# Altium PCB BOCD_1_02_Daughter_NBP2.PcbDoc (part 2 of 2)
Units mil, origin at the board's own origin, x right, y up, seen from the top; angles counter-clockwise.
Board outline 2716.51 x 3188.78 mil, 2 copper layers (Top Layer, Bottom Layer); 52 components, 189 nets, 558 pads, 192 vias.
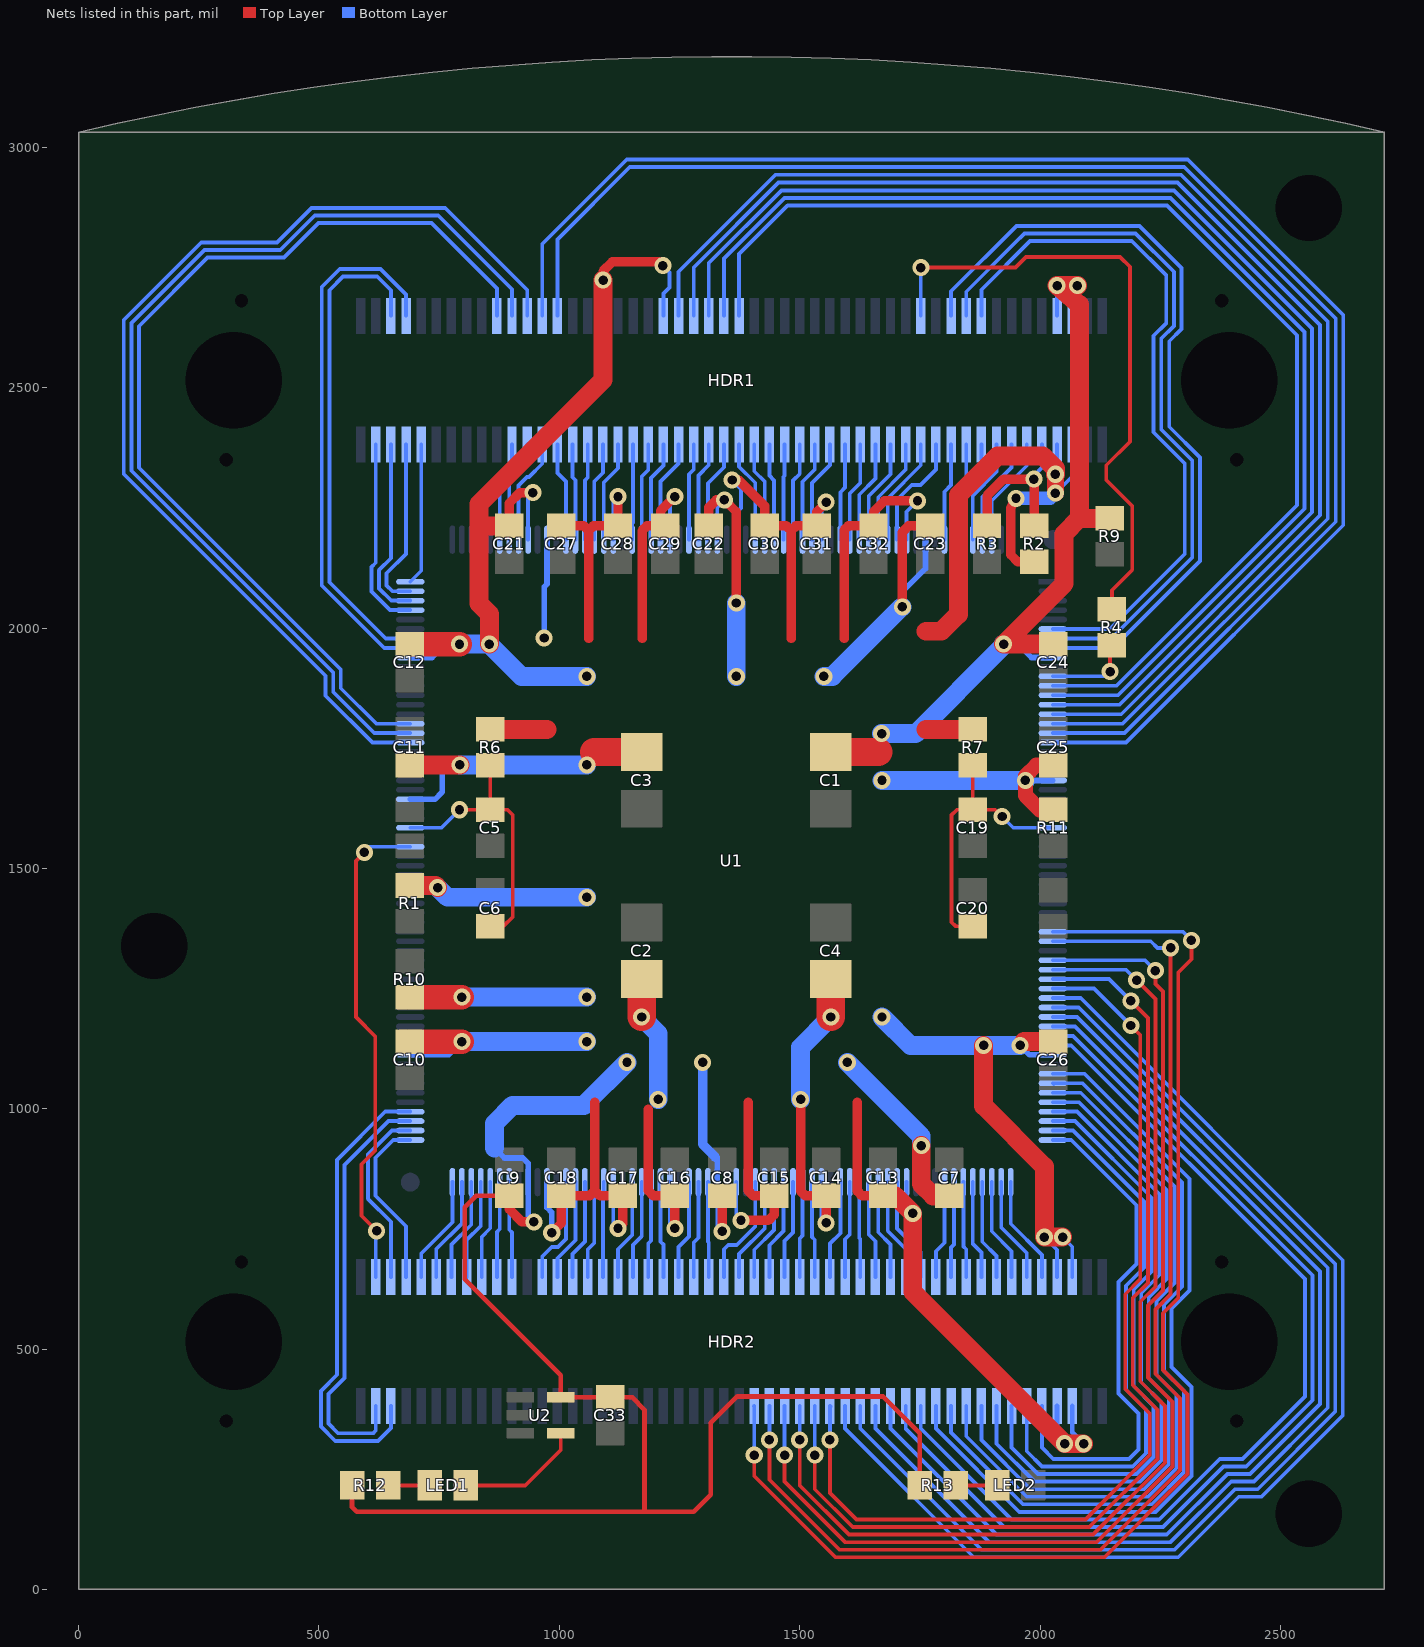
[diagram p2: the nets of this part, all layers, seen from the top]

## Via types
v1: diameter 35.43, hole 19.68, Top Layer to Bottom Layer, 192 vias

## Nets (pads, with @x,y where several pads share a name; then routed paths per layer and width w, separated by ;. In a path a pad name is that pad's centre, name@x,y a point inside that pad or via, vN(x,y) a via of type N, cw(c..) or ccw(c..) an arc to the next point about the centre after c; other vN are vias at no path point) (continued)
IO23: HDR2.53 U1.38 | length 2641.5
  Top Layer w7.87: v1(1405.51,279.53) 1405.51,236.22 1574.8,66.93 2133.86,66.93 2307.09,240.16 2307.09,405.51 2255.91,456.69 2255.91,574.8 2287.4,606.3 2287.4,1283.46 2314.96,1311.02 v1(2314.96,1350.39)
  Bottom Layer w7.87: HDR2.53@1405,381.38 HDR2.53@1405.51,381.89 v1(1405.51,279.53) ; U1.38@2026.57,1368.11 2297.24,1368.11 v1(2314.96,1350.39)
IO24: HDR2.55 U1.39 | length 2508.4
  Top Layer w7.87: v1(1437.01,311.02) 1437.01,228.35 1582.68,82.68 2125.98,82.68 2291.34,248.03 2291.34,397.64 2240.16,448.82 2240.16,582.68 2271.65,614.17 v1(2271.65,1334.65)
  Bottom Layer w7.87: v1(1437.01,311.02) HDR2.55@1437.01,381.89 ; U1.39@2026.57,1348.43 2230.31,1348.43 2244.09,1334.65 v1(2271.65,1334.65)
IO25: HDR2.57 U1.41 | length 2376.8
  Top Layer w7.87: v1(1468.5,279.53) 1468.5,224.41 1594.49,98.43 2118.11,98.43 2275.59,255.91 2275.59,389.76 2224.41,440.94 2224.41,590.55 2255.91,622.05 2255.91,1244.09 2240.16,1259.84 v1(2240.16,1287.4)
  Bottom Layer w7.87: v1(1468.5,279.53) HDR2.57@1468.5,381.89 ; U1.41@2026.57,1309.06 2218.5,1309.06 v1(2240.16,1287.4)
IO26: HDR2.59 U1.42 | length 2267.2
  Top Layer w7.87: v1(1500,311.02) 1500,216.54 1602.36,114.17 2110.24,114.17 2259.84,263.78 2259.84,381.89 2208.66,433.07 2208.66,598.43 2240.16,629.92 2240.16,1228.35 v1(2200.79,1267.72)
  Bottom Layer w7.87: v1(1500,311.02) HDR2.59@1500,381.89 ; U1.42@2026.57,1289.37 2179.13,1289.37 v1(2200.79,1267.72)
IO27: HDR2.61 U1.43 | length 2160
  Top Layer w7.87: v1(1531.5,279.53) 1531.5,208.66 1610.24,129.92 2102.36,129.92 2244.09,271.65 2244.09,374.02 2192.91,425.2 2192.91,606.3 2224.41,637.8 2224.41,1188.98 v1(2188.98,1224.41)
  Bottom Layer w7.87: v1(1531.5,279.53) HDR2.61@1531.5,381.89 ; U1.43@2026.57,1269.69 2143.7,1269.69 v1(2188.98,1224.41)
IO28: HDR2.63 U1.44 | length 2056.4
  Top Layer w7.87: v1(1562.99,311.02) 1562.99,200.79 1618.11,145.67 2094.49,145.67 2228.35,279.53 2228.35,366.14 2177.17,417.32 2177.17,614.17 2208.66,645.67 2208.66,1153.54 v1(2188.98,1173.23)
  Bottom Layer w7.87: v1(1562.99,311.02) HDR2.63@1562.99,381.89 HDR2.63@1563.98,380.91 ; U1.44@2026.57,1250 2112.2,1250 v1(2188.98,1173.23)
IO29: HDR2.65 U1.45 | length 2467.9
  Bottom Layer w7.87: HDR2.65@1594.49,381.89 1594.49,334.65 1862.2,66.93 2287.4,66.93 2413.39,192.91 2460.63,192.91 2629.92,362.2 2629.92,685.04 2084.64,1230.32 U1.45@2026.57,1230.32
IO30: HDR2.67 U1.46 | length 2374.5
  Bottom Layer w7.87: HDR2.67@1625.98,381.89 1625.98,334.65 1877.95,82.68 2279.53,82.68 2405.51,208.66 2452.76,208.66 2614.17,370.08 2614.17,677.17 2080.71,1210.63 U1.46@2026.57,1210.63
IO31: HDR2.69 U1.47 | length 2281.1
  Bottom Layer w7.87: HDR2.69@1657.48,381.89 1657.48,334.65 1893.7,98.43 2271.65,98.43 2397.64,224.41 2444.88,224.41 2598.43,377.95 2598.43,669.29 2076.77,1190.94 U1.47@2026.57,1190.94
IO32: HDR2.71 U1.48 | length 2187.7
  Bottom Layer w7.87: HDR2.71@1688.98,381.89 1688.98,334.65 1909.45,114.17 2263.78,114.17 2389.76,240.16 2437.01,240.16 2582.68,385.83 2582.68,661.42 2072.83,1171.26 U1.48@2026.57,1171.26
IO33: HDR2.73 U1.49 | length 2094.2
  Bottom Layer w7.87: HDR2.73@1720.47,381.89 1720.47,334.64 1925.2,129.92 2255.91,129.92 2381.89,255.91 2429.13,255.91 2566.93,393.7 2566.93,653.54 2068.9,1151.57 U1.49@2026.57,1151.57
IO34: HDR2.75 U1.50 | length 2000.8
  Bottom Layer w7.87: HDR2.75@1751.97,381.89 1751.97,334.65 1940.95,145.67 2248.03,145.67 2374.02,271.65 2421.26,271.65 2551.18,401.57 2551.18,645.67 2064.96,1131.89 U1.50@2026.57,1131.89
IO35: HDR2.77 U1.53 | length 1707.2
  Bottom Layer w7.87: HDR2.77@1783.47,381.89 1783.47,334.65 1956.69,161.42 2240.16,161.42 2314.96,236.22 2314.96,421.26 2273.62,462.6 2273.62,584.65 2311.02,622.05 2311.02,854.33 2092.52,1072.83 U1.53@2026.57,1072.83
JIOA0: HDR1.3 U1.177 | length 406.4
  Bottom Layer w7.87: HDR1.3@618.11,2381.89 618.11,2135.9 609.25,2127.05 609.25,2075.79 647.64,2037.4 U1.177@689.96,2037.4
JIOA1: HDR1.5 U1.178 | length 385.2
  Bottom Layer w7.87: HDR1.5@649.61,2381.89 649.61,2145.13 625,2120.52 625,2082.31 650.22,2057.09 U1.178@689.96,2057.09
JIOA2: HDR1.7 U1.179 | length 364
  Bottom Layer w7.87: HDR1.7@681.1,2381.89 681.1,2154.35 640.75,2114 640.75,2088.83 652.81,2076.77 U1.179@689.96,2076.77
JIOA3: HDR1.9 U1.180 | length 294.8
  Bottom Layer w7.87: U1.180@689.96,2096.46 712.6,2119.09 HDR1.9@712.6,2381.89
JIOB0: HDR1.83 U1.235 | length 213.3
  Bottom Layer w7.87: U1.235@1840.55,2184.06 1840.55,2278.42 1877.95,2315.82 HDR1.83@1877.95,2381.89
JIOB1: HDR1.85 U1.236 | length 218.2
  Bottom Layer w7.87: U1.236@1860.24,2184.06 1860.24,2275.83 1909.45,2325.05 HDR1.85@1909.45,2381.89
JIOB2: HDR1.87 U1.237 | length 223.1
  Bottom Layer w7.87: U1.237@1879.92,2184.06 1879.92,2273.25 1940.95,2334.27 HDR1.87@1940.95,2381.89
JIOB3: HDR1.89 U1.238 | length 228
  Bottom Layer w7.87: U1.238@1899.61,2184.06 1899.61,2264.76 1972.44,2337.6 HDR1.89@1972.44,2381.89
KBCLOCK: HDR1.22 U1.164 | length 2140.4
  Bottom Layer w7.87: U1.164@689.96,1781.5 615.16,1781.5 529.53,1867.13 529.53,1907.34 109.75,2327.12 109.75,2634.61 261.56,2786.42 419.29,2786.42 491.14,2858.27 748.03,2858.27 901.57,2704.72 HDR1.22@901.57,2649.61
KBDATA: HDR1.24 U1.163 | length 2232.5
  Bottom Layer w7.87: U1.163@689.96,1761.81 611.22,1761.81 513.78,1859.25 513.78,1900.82 94,2320.6 94,2641.13 255.04,2802.17 412.77,2802.17 484.62,2874.02 762.8,2874.02 933.07,2703.74 HDR1.24@933.07,2649.61
LCD_BCKL: HDR2.22 U1.114 | length 203.1
  Bottom Layer w7.87: U1.114@897.64,845.47 U1.114@895.67,847.44 895.67,748.28 901.57,742.38 HDR2.22@901.57,649.61
LCD_E: HDR2.26 U1.108 | length 225.7
  Bottom Layer w7.87: HDR2.26@964.57,649.61 964.57,692.91 984.25,712.6 997.05,712.6 1013.78,729.33 U1.108@1013.78,847.44
LED0: HDR2.60 U1.83 | length 200.3
  Bottom Layer w7.87: HDR2.60@1500,649.61 1500,730.32 1505.91,736.22 U1.83@1505.91,847.44
LED1: HDR2.62 U1.82 | length 200.3
  Bottom Layer w7.87: U1.82@1525.59,847.44 1525.59,733.27 1531.5,727.36 HDR2.62@1531.5,649.61
LED2: HDR2.64 U1.79 | length 206.8
  Bottom Layer w7.87: HDR2.64@1562.99,649.61 1562.99,719.49 1584.65,741.14 U1.79@1584.65,847.44
LED3: HDR2.66 U1.78 | length 201.9
  Bottom Layer w7.87: HDR2.66@1594.49,649.61 1594.49,728.71 1604.33,738.56 U1.78@1604.33,847.44
LED4: HDR2.68 U1.77 | length 198.7
  Bottom Layer w7.87: U1.77@1624.02,847.44 1624.02,731.3 1625.98,729.33 HDR2.68@1625.98,649.61
LED5: HDR2.70 U1.76 | length 203.5
  Bottom Layer w7.87: U1.76@1643.7,847.44 1643.7,738.19 1657.48,724.41 HDR2.70@1657.48,649.61
LED6: HDR2.72 U1.75 | length 208.4
  Bottom Layer w7.87: U1.75@1663.39,847.44 1663.39,743.11 1688.98,717.52 HDR2.72@1688.98,649.61
LED7: HDR2.74 U1.74 | length 213.3
  Bottom Layer w7.87: U1.74@1683.07,847.44 1683.07,746.06 1720.47,708.66 HDR2.74@1720.47,649.61
MOUSECLOCK: HDR1.26 U1.18 | length 3251.5
  Bottom Layer w7.87: HDR1.26@964.57,2649.61 964.57,2799.21 1140.1,2974.75 2307.25,2974.75 2630.91,2651.09 2630.91,2213.91 2178.81,1761.81 U1.18@2026.57,1761.81
MOUSEDATA: HDR1.28 U1.17 | length 3164.2
  Bottom Layer w7.87: HDR1.28@996.06,2649.61 996.06,2808.44 1146.63,2959 2300,2959 2615.16,2643.84 2615.16,2221.16 2175.5,1781.5 U1.17@2026.57,1781.5
NetC5_1: C5.1 C6.1 R6.2 U1.154 | length 592.2
  Top Layer w7.87: v1(792.32,1622.05) C5.1@856.3,1622.05 ; C6.1@856.3,1379.92 883.92,1379.92 903,1399 903,1611 891.95,1622.05 C5.1@856.3,1622.05 ; R6.2@856.3,1714.57 C5.1@856.3,1622.05
  Bottom Layer w7.87: U1.154@689.96,1584.65 754.92,1584.65 v1(792.32,1622.05)
NetC19_2: C19.2 C20.2 R7.2 U1.27 | length 593.7
  Top Layer w7.87: C20.2@1860.24,1379.92 1824.08,1379.92 1816,1388 1816,1611 1827.05,1622.05 1906.95,1622.05 v1(1921,1608) ; C19.2@1860.24,1622.05 R7.2@1860.24,1714.57
  Bottom Layer w7.87: v1(1921,1608) 1944.35,1584.65 U1.27@2026.57,1584.65
NetLED1_1: LED1.1 R12.2 | length 86.6
  Top Layer w7.87: R12.2@643.7,216.54 LED1.1@730.32,216.54
NetLED1_2: LED1.2 U2.4 | length 262.9
  Top Layer w7.87: LED1.2@805.12,216.54 929.13,216.54 1002.95,290.35 U2.4@1002.95,324.8
NetLED2_1: LED2.1 R13.2 | length 86.6
  Top Layer w7.87: R13.2@1824.8,216.54 LED2.1@1911.42,216.54
NEXUS_TCK: HDR1.82 U1.7 | length 1557.6
  Bottom Layer w7.87: HDR1.82@1846.46,2649.61 1846.46,2699.8 1947.53,2800.88 1967.52,2820.87 2198.82,2820.87 2278.54,2741.14 2278.54,2628.39 2252,2601.84 2252,2413.73 2316.78,2348.95 2316.78,2146.78 2148.35,1978.35 U1.7@2026.57,1978.35
NEXUS_TDI: HDR1.84 U1.6 | length 1467
  Bottom Layer w7.87: HDR1.84@1877.95,2649.61 1877.95,2703.74 1979.33,2805.12 2190.94,2805.12 2262.8,2733.27 2262.8,2634.91 2236,2608.11 2236,2407.46 2301,2342.46 2301,2154.03 2145,1998.03 U1.6@2026.57,1998.03
NEXUS_TDO: HDR1.76 R4.2 | length 1325.6
  Top Layer w7.87: v1(1751.97,2750) 1949.08,2750 1971.09,2772.01 2166.64,2772.01 2187.01,2751.64 2187.01,2387.8 2137.8,2338.58 2137.8,2308.2 2192,2254 2192,2121.13 2149.61,2078.74 R4.2@2149.61,2039.37
  Bottom Layer w7.87: HDR1.76@1751.97,2649.61 v1(1751.97,2750)
NEXUS_TDO#: R4.1 U1.11 | length 194
  Top Layer w7.87: v1(2145.67,1909.45) R4.1@2145.67,1980.31
  Bottom Layer w7.87: U1.11@2026.57,1899.61 2135.83,1899.61 v1(2145.67,1909.45)
NEXUS_TMS: HDR1.80 U1.8 | length 1650.8
  Bottom Layer w7.87: HDR1.80@1814.96,2649.61 1814.96,2700.79 1950.79,2836.61 2206.69,2836.61 2294.29,2749.02 2294.29,2621.86 2269,2596.57 2269,2419 2333,2355 2333,2139.66 2152,1958.66 U1.8@2026.57,1958.66
RAM0_DATA0: HDR2.42 U1.98 | length 200.3
  Bottom Layer w7.87: U1.98@1210.63,847.44 1210.63,723.43 1216.54,717.52 HDR2.42@1216.54,649.61
RAM0_DATA1: HDR2.40 U1.99 | length 200.3
  Bottom Layer w7.87: HDR2.40@1185.04,649.61 1185.04,719.49 1190.94,725.39 U1.99@1190.94,847.44
RAM0_DATA2: HDR2.38 U1.100 | length 205.2
  Bottom Layer w7.87: HDR2.38@1153.54,649.61 1153.54,716.9 1171.26,734.62 U1.100@1171.26,847.44
RAM0_DATA3: HDR2.36 U1.101 | length 210.1
  Bottom Layer w7.87: HDR2.36@1122.05,649.61 1122.05,707.68 1151.57,737.2 U1.101@1151.57,847.44
RAM0_DATA4: HDR2.34 U1.104 | length 198.7
  Bottom Layer w7.87: HDR2.34@1090.55,649.61 1090.55,810.04 1092.52,812.01 U1.104@1092.52,847.44
RAM0_DATA5: HDR2.32 U1.105 | length 203.5
  Bottom Layer w7.87: HDR2.32@1059.05,649.61 1059.05,707.43 1072.83,721.21 U1.105@1072.83,847.44
RAM0_DATA6: HDR2.30 U1.106 | length 208.4
  Bottom Layer w7.87: HDR2.30@1027.56,649.61 1027.56,698.2 1053.15,723.79 U1.106@1053.15,847.44
RAM0_DATA7: HDR2.28 U1.107 | length 213.3
  Bottom Layer w7.87: HDR2.28@996.06,649.61 996.06,688.98 1033.46,726.38 U1.107@1033.46,847.44
RAM0_OE: HDR1.41 U1.202 | length 208.4
  Bottom Layer w7.87: U1.202@1190.94,2184.06 1190.94,2312.37 1216.54,2337.97 HDR1.41@1216.54,2381.89
RAM0_WE: HDR1.79 U1.233 | length 203.5
  Bottom Layer w7.87: U1.233@1801.18,2184.06 1801.18,2283.59 1814.96,2297.37 HDR1.79@1814.96,2381.89
RAM1_DATA0: HDR1.45 U1.206 | length 201.9
  Bottom Layer w7.87: U1.206@1269.69,2184.06 1269.69,2319.88 1279.53,2329.72 HDR1.45@1279.53,2381.89
RAM1_DATA1: HDR1.49 U1.208 | length 211.7
  Bottom Layer w7.87: U1.208@1309.06,2184.06 1309.06,2301.18 1342.52,2334.65 HDR1.49@1342.52,2381.89
RAM1_DATA2: HDR1.53 U1.214 | length 206.8
  Bottom Layer w7.87: HDR1.53@1405.51,2381.89 1405.51,2326.4 1427.17,2304.75 U1.214@1427.17,2184.06
RAM1_DATA3: HDR1.57 U1.216 | length 198.6
  Bottom Layer w7.87: U1.216@1466.54,2184.06 1466.54,2314.96 1468.5,2316.93 HDR1.57@1468.5,2381.89
RAM1_DATA4: HDR1.55 U1.215 | length 201.9
  Bottom Layer w7.87: HDR1.55@1437.01,2381.89 1437.01,2317.18 1446.85,2307.34 U1.215@1446.85,2184.06
RAM1_DATA5: HDR1.51 U1.213 | length 211.7
  Bottom Layer w7.87: HDR1.51@1374.02,2381.89 1374.02,2335.63 1407.48,2302.17 U1.213@1407.48,2184.06
RAM1_DATA6: HDR1.47 U1.207 | length 206.8
  Bottom Layer w7.87: U1.207@1289.37,2184.06 1289.37,2317.3 1311.02,2338.95 HDR1.47@1311.02,2381.89
RAM1_DATA7: HDR1.43 U1.203 | length 213.3
  Bottom Layer w7.87: U1.203@1210.63,2184.06 1210.63,2305.12 1248.03,2342.52 HDR1.43@1248.03,2381.89
RAM1_OE: HDR1.39 U1.201 | length 203.5
  Bottom Layer w7.87: U1.201@1171.26,2184.06 1171.26,2314.96 1185.04,2328.74 HDR1.39@1185.04,2381.89
RAM1_WE: HDR1.61 U1.218 | length 208.4
  Bottom Layer w7.87: U1.218@1505.91,2184.06 1505.91,2304.5 1531.5,2330.09 HDR1.61@1531.5,2381.89
RAM_ADDR0: HDR1.21 U1.186 | length 208.4
  Bottom Layer w7.87: U1.186@875.98,2184.06 875.98,2308.64 901.57,2334.23 HDR1.21@901.57,2381.89
RAM_ADDR1: HDR1.25 U1.188 | length 220.6
  Bottom Layer w7.87: U1.188@915.35,2184.06 915.35,2296.79 932.97,2314.4 936.97,2314.4 964.57,2342 HDR1.25@964.57,2381.89
RAM_ADDR2: HDR1.29 U1.194 | length 200.3
  Bottom Layer w7.87: HDR1.29@1027.56,2381.89 1027.56,2313.61 1033.46,2307.7 U1.194@1033.46,2184.06
RAM_ADDR3: HDR1.33 U1.196 | length 205.2
  Bottom Layer w7.87: U1.196@1072.83,2184.06 1072.83,2305.38 1090.55,2323.1 HDR1.33@1090.55,2381.89
RAM_ADDR4: HDR1.65 U1.222 | length 201.9
  Bottom Layer w7.87: U1.222@1584.65,2184.06 1584.65,2282.61 1594.49,2292.46 HDR1.65@1594.49,2381.89
RAM_ADDR5: HDR1.69 U1.224 | length 211.7
  Bottom Layer w7.87: U1.224@1624.02,2184.06 1624.02,2277.44 1657.48,2310.91 HDR1.69@1657.48,2381.89
RAM_ADDR6: HDR1.73 U1.226 | length 221.5
  Bottom Layer w7.87: U1.226@1663.39,2184.06 1663.39,2272.27 1720.47,2329.36 HDR1.73@1720.47,2381.89
RAM_ADDR7: HDR1.77 U1.228 | length 241.8
  Bottom Layer w7.87: U1.228@1702.76,2184.06 1702.76,2266.93 1733.27,2297.44 1751.18,2297.44 1783.47,2329.73 HDR1.77@1783.47,2381.89
RAM_ADDR8: HDR1.75 U1.227 | length 226.4
  Bottom Layer w7.87: U1.227@1683.07,2184.06 1683.07,2269.68 1751.97,2338.58 HDR1.75@1751.97,2381.89
RAM_ADDR9: HDR1.71 U1.225 | length 216.6
  Bottom Layer w7.87: U1.225@1643.7,2184.06 1643.7,2274.86 1688.98,2320.13 HDR1.71@1688.98,2381.89
RAM_ADDR10: HDR1.67 U1.223 | length 206.8
  Bottom Layer w7.87: U1.223@1604.33,2184.06 1604.33,2280.03 1625.98,2301.68 HDR1.67@1625.98,2381.89
RAM_ADDR11: HDR1.63 U1.219 | length 213.3
  Bottom Layer w7.87: U1.219@1525.59,2184.06 1525.59,2301.91 1562.99,2339.32 HDR1.63@1562.99,2381.89
RAM_ADDR12: HDR1.59 U1.217 | length 203.5
  Bottom Layer w7.87: U1.217@1486.22,2184.06 1486.22,2307.09 1500,2320.87 HDR1.59@1500,2381.89
RAM_ADDR13: HDR1.35 U1.197 | length 210.1
  Bottom Layer w7.87: U1.197@1092.52,2184.06 1092.52,2302.79 1122.05,2332.32 HDR1.35@1122.05,2381.89
RAM_ADDR14: HDR1.31 U1.195 | length 200.3
  Bottom Layer w7.87: U1.195@1053.15,2184.06 1053.15,2307.1 1059.05,2313 HDR1.31@1059.05,2381.89
RAM_ADDR15: HDR1.27 U1.193 | length 205.2
  Bottom Layer w7.87: HDR1.27@996.06,2381.89 996.06,2322.83 1013.78,2305.12 U1.193@1013.78,2184.06
RAM_ADDR16: HDR1.23 U1.187 | length 213.3
  Bottom Layer w7.87: U1.187@895.67,2184.06 895.67,2302.6 933.07,2340 HDR1.23@933.07,2381.89
RAM_CS: HDR1.37 U1.200 | length 198.7
  Bottom Layer w7.87: U1.200@1151.57,2184.06 1151.57,2217.52 1153.54,2219.49 HDR1.37@1153.54,2381.89
RED0: HDR1.6 U1.174 | length 1028.9
  Bottom Layer w7.87: HDR1.6@649.61,2649.61 649.61,2702.76 621.06,2731.3 550.2,2731.3 521.65,2702.76 521.65,2095.47 638.78,1978.35 U1.174@689.96,1978.35
RED1: HDR1.8 U1.173 | length 1115.9
  Bottom Layer w7.87: HDR1.8@681.1,2649.61 681.1,2693.9 627.95,2747.05 543.31,2747.05 505.91,2709.65 505.91,2088.58 635.83,1958.66 U1.173@689.96,1958.66
REF_CLK: HDR2.4 U1.152 | length 1034.6
  Top Layer w7.87: v1(594.49,1533.46) 576.77,1515.75 576.77,1190.77 617,1150.54 617,913 588.5,884.5 588.5,777.65 v1(620.08,746.06)
  Bottom Layer w7.87: v1(594.49,1533.46) 604.33,1545.28 U1.152@689.96,1545.28 ; HDR2.4@618.11,649.61 618.11,744.09 v1(620.08,746.06)
SCL: HDR2.5 U1.124 | length 978.3
  Bottom Layer w7.87: HDR2.5@649.61,381.89 649.61,335.63 622.87,308.89 533.88,308.89 503.94,338.83 503.94,413.12 537.4,446.58 537.4,893.7 637.79,994.09 U1.124@689.96,994.09
SDA: HDR2.3 U1.123 | length 886.7
  Bottom Layer w7.87: HDR2.3@618.11,381.89 618.11,330.71 612.2,324.8 540.24,324.8 519.68,345.36 519.68,406.6 553.15,440.06 553.15,882.87 644.69,974.41 U1.123@689.96,974.41
SP0: HDR2.79 U1.54 | length 1621.1
  Bottom Layer w7.87: HDR2.79@1814.96,381.89 1814.96,326.77 1964.57,177.17 2232.28,177.17 2299.21,244.09 2299.21,413.39 2257.87,454.72 2257.87,592.52 2295.28,629.92 2295.28,846.46 2088.58,1053.15 U1.54@2026.57,1053.15 U1.54@2028.54,1051.18
SP1: HDR2.81 U1.55 | length 1529.6
  Bottom Layer w7.87: HDR2.81@1846.46,381.89 1846.46,318.9 1972.44,192.91 2224.41,192.91 2283.46,251.97 2283.46,405.51 2242.13,446.85 2242.13,600.39 2279.53,637.8 2279.53,838.58 2084.65,1033.46 U1.55@2026.57,1033.46
SP2: HDR2.83 U1.56 | length 1440.7
  Bottom Layer w7.87: HDR2.83@1877.95,381.89 1877.95,311.02 1980.32,208.66 2216.54,208.66 2267.72,259.84 2267.72,397.64 2226.38,438.98 2226.38,608.27 2263.78,645.67 2263.78,830.71 2080.71,1013.78 U1.56@2026.57,1013.78
SP3: HDR2.85 U1.57 | length 1351.9
  Bottom Layer w7.87: HDR2.85@1909.45,381.89 1909.45,303.15 1988.19,224.41 2208.66,224.41 2251.97,267.72 2251.97,389.76 2210.63,431.1 2210.63,616.14 2248.03,653.54 2248.03,822.83 2076.77,994.09 U1.57@2026.57,994.09
SP4: HDR2.87 U1.58 | length 1263.1
  Bottom Layer w7.87: HDR2.87@1940.95,381.89 1940.95,295.27 1996.06,240.16 2200.79,240.16 2236.22,275.59 2236.22,381.89 2194.88,423.23 2194.88,624.02 2232.28,661.42 2232.28,814.96 2072.83,974.41 U1.58@2026.57,974.41
SP5: HDR2.89 U1.59 | length 1174.3
  Bottom Layer w7.87: HDR2.89@1972.44,381.89 1972.44,287.4 2003.94,255.91 2192.91,255.91 2220.47,283.46 2220.47,374.02 2179.13,415.35 2179.13,631.89 2216.54,669.29 2216.54,807.09 2068.9,954.72 U1.59@2026.57,954.72
SP6: HDR2.91 U1.60 | length 1076.3
  Bottom Layer w7.87: HDR2.91@2003.94,381.89 2003.94,295.28 2027.56,271.65 2185.04,271.65 2204.72,291.34 2204.72,366.14 2163.39,407.48 2163.39,639.76 2200.79,677.17 2200.79,799.21 2064.96,935.04 U1.60@2026.57,935.04
SP7: HDR2.92 U1.61 | length 224.7
  Bottom Layer w7.87: U1.61@1938.98,847.44 1938.98,760.83 2003.94,695.87 HDR2.92@2003.94,649.61
SP8: HDR2.90 U1.62 | length 219.9
  Bottom Layer w7.87: U1.62@1919.29,847.44 1919.29,752.95 1972.44,699.8 HDR2.90@1972.44,649.61
SP9: HDR2.88 U1.63 | length 215
  Bottom Layer w7.87: U1.63@1899.61,847.44 1899.61,745.08 1940.95,703.74 HDR2.88@1940.95,649.61
SP10: HDR2.86 U1.64 | length 210.1
  Bottom Layer w7.87: U1.64@1879.92,847.44 1879.92,723.43 1909.45,693.9 HDR2.86@1909.45,649.61
SP11: HDR2.84 U1.65 | length 205.2
  Bottom Layer w7.87: U1.65@1860.24,847.44 1860.24,718.5 1877.95,700.79 HDR2.84@1877.95,649.61
SP12: HDR2.82 U1.66 | length 200.3
  Bottom Layer w7.87: U1.66@1840.55,847.44 1840.55,713.58 1846.46,707.68 HDR2.82@1846.46,649.61
SP13: HDR2.80 U1.67 | length 200.3
  Bottom Layer w7.87: HDR2.80@1814.96,649.61 1814.96,711.61 1820.87,717.52 U1.67@1820.87,847.44
SP14: HDR2.78 U1.68 | length 205.2
  Bottom Layer w7.87: HDR2.78@1783.47,649.61 1783.47,703.74 1801.18,721.46 U1.68@1801.18,847.44
SP15: HDR2.76 U1.73 | length 218.2
  Bottom Layer w7.87: U1.73@1702.76,847.44 1702.76,750.98 1751.97,701.77 HDR2.76@1751.97,649.61
SPI_CLK: HDR1.46 U1.15 | length 2723.1
  Bottom Layer w7.87: HDR1.46@1279.53,2649.61 1279.53,2750.37 1456.16,2927 2286,2927 2582.68,2630.32 2582.68,2234.68 2168.87,1820.87 U1.15@2026.57,1820.87
SPI_DIN: HDR1.44 U1.16 | length 2810.6
  Bottom Layer w7.87: HDR1.44@1248.03,2649.61 1248.03,2741.14 1449.89,2943 2293,2943 2598.43,2637.57 2598.43,2227.43 2172.18,1801.18 U1.16@2026.57,1801.18
SPI_DOUT: HDR1.50 U1.13 | length 2546.5
  Bottom Layer w7.87: HDR1.50@1342.52,2649.61 1342.52,2768.82 1468.45,2894.75 2271.25,2894.75 2550.2,2615.8 2550.2,2248.2 2162.24,1860.24 U1.13@2026.57,1860.24
SPI_MODE: HDR1.52 U1.12 | length 2459.5
  Bottom Layer w7.87: HDR1.52@1374.02,2649.61 1374.02,2778.04 1474.97,2879 2264.45,2879 2534.45,2609 2534.45,2255.45 2158.92,1879.92 U1.12@2026.57,1879.92
SPI_SEL: HDR1.48 U1.14 | length 2633.8
  Bottom Layer w7.87: HDR1.48@1311.02,2649.61 1311.02,2759.59 1461.93,2910.5 2278.5,2910.5 2565.94,2623.06 2565.94,2240.94 2165.55,1840.55 U1.14@2026.57,1840.55
SW0: HDR2.44 U1.95 | length 206.8
  Bottom Layer w7.87: HDR2.44@1248.03,649.61 1248.03,712.6 1269.69,734.25 U1.95@1269.69,847.44
SW1: HDR2.46 U1.94 | length 201.9
  Bottom Layer w7.87: HDR2.46@1279.53,649.61 1279.53,721.82 1289.37,731.67 U1.94@1289.37,847.44
SW2: HDR2.48 U1.93 | length 198.7
  Bottom Layer w7.87: U1.93@1309.06,847.44 1309.06,723.43 1311.02,721.46 HDR2.48@1311.02,649.61
SW3: HDR2.50 U1.88 | length 235.1
  Bottom Layer w7.87: HDR2.50@1342.52,649.61 1342.52,707.68 1351.38,716.54 1369.09,716.54 1407.48,754.92 U1.88@1407.48,847.44
SW4: HDR2.52 U1.87 | length 219.9
  Bottom Layer w7.87: HDR2.52@1374.02,649.61 1374.02,697.83 1427.17,750.98 U1.87@1427.17,847.44
SW5: HDR2.54 U1.86 | length 215
  Bottom Layer w7.87: HDR2.54@1405.51,649.61 1405.51,706.69 1446.85,748.03 U1.86@1446.85,847.44
SW6: HDR2.56 U1.85 | length 210.1
  Bottom Layer w7.87: HDR2.56@1437.01,649.61 1437.01,715.92 1466.54,745.45 U1.85@1466.54,847.44
SW7: HDR2.58 U1.84 | length 205.2
  Bottom Layer w7.87: HDR2.58@1468.5,649.61 1468.5,725.14 1486.22,742.86 U1.84@1486.22,847.44
SWC0: HDR2.18 U1.116 | length 205.2
  Bottom Layer w7.87: HDR2.18@838.58,649.61 838.58,733.58 856.3,751.3 U1.116@856.3,847.44
SWC1: HDR2.16 U1.117 | length 210.1
  Bottom Layer w7.87: HDR2.16@807.09,649.61 807.09,726.78 836.61,756.3 U1.117@836.61,847.44
SWC2: HDR2.14 U1.118 | length 215
  Bottom Layer w7.87: HDR2.14@775.59,649.61 775.59,717.55 816.93,758.89 U1.118@816.93,847.44
SWC3: HDR2.6 U1.122 | length 383.5
  Bottom Layer w7.87: HDR2.6@649.61,649.61 649.61,765 602,812.61 602,904.78 651.94,954.72 U1.122@689.96,954.72
SWR0: HDR2.20 U1.115 | length 200.3
  Bottom Layer w7.87: HDR2.20@870.08,649.61 870.08,743.67 875.98,749.58 U1.115@875.98,847.44
SWR1: HDR2.12 U1.119 | length 219.9
  Bottom Layer w7.87: HDR2.12@744.09,649.61 744.09,708.32 797.24,761.48 U1.119@797.24,847.44
SWR2: HDR2.10 U1.120 | length 224.7
  Bottom Layer w7.87: HDR2.10@712.6,649.61 712.6,699.1 777.56,764.06 U1.120@777.56,847.44
SWR3: HDR2.8 U1.121 | length 362.3
  Bottom Layer w7.87: HDR2.8@681.1,649.61 681.1,755.78 617.75,819.13 617.75,898.26 654.53,935.04 U1.121@689.96,935.04
TEST: HDR1.81 U1.234 | length 208.4
  Bottom Layer w7.87: U1.234@1820.87,2184.06 1820.87,2281.01 1846.46,2306.6 HDR1.81@1846.46,2381.89
VCC: C1.1 C3.1 C7.1 C8.1 C9.1 C10.1 C11.1 C12.1 C21.2 C22.2 C23.2 C24.2 C25.2 C26.2 C33.1 HDR1.34 HDR1.42 HDR1.94 HDR1.96 HDR2.94 HDR2.96 R1.1 R9.1 R10.1 R11.1 R12.1 R13.1 U1.9 U1.22 U1.51 U1.70 U1.92 U1.112 U1.130 U1.157 U1.172 U1.189 U1.209 U1.231 U2.5 | length 12506.2
  Top Layer w9.84: R12.1@568.9,216.54 568.9,171.26 578.74,161.42 1279.53,161.42 1314.96,196.85 1314.96,346.46 1370.08,401.57 1673.23,401.57 1750,324.8 R13.1@1750,216.54 ; C9.1@895.67,818.9 826.77,818.9 803.15,795.28 803.15,645.67 1002.95,445.87 U2.5@1002.95,399.61 1151.57,399.61 1177.17,374.02 1177.17,161.42
  Top Layer w19.68: C9.1@895.67,818.9 895.67,791.34 922.24,764.76 v1(946.85,764.76) ; C21.2@895.67,2212.6 895.67,2259.67 918,2282 v1(945,2282) ; v1(1091,2724) 1091,2742.8 1110,2761.8 1207.68,2761.8 v1(1215.54,2753.95) ; C22.2@1311.02,2212.6 1311.02,2250.98 1326.77,2266.73 v1(1343.5,2266.73) 1368.11,2242.13 v1(1368.11,2052.17) ; v1(1338.58,745.08) C8.1@1338.58,818.9 ; v1(1713.58,2044.29) 1713.58,2199.8 1726.38,2212.6 C23.2@1771.65,2212.6
  Top Layer w31.5: R11.1@2027.56,1622.05 1999.02,1622.05 1969.49,1651.57 1969.49,1691.93 1992.13,1714.57 C25.2@2027.56,1714.57
  Top Layer w39.37: R1.1@688.98,1464.57 742.43,1464.57 v1(747,1460) ; C11.1@688.98,1714.57 689.96,1715.55 v1(793.31,1715.55) ; 832.68,2212.6 C21.2@895.67,2212.6 ; v1(854.33,1966.54) 854.33,2029.53 832.68,2051.18 832.68,2258 1091,2516.32 v1(1091,2724) ; v1(1752.95,923.22) 1752.95,843.5 1777.56,818.9 C7.1@1811.02,818.9 ; v1(1882.7,1131.75) 1882.7,1006.05 2009,879.75 v1(2009,733) v1(2047,733) ; v1@1966.54,1139.76 C26.2@2027.56,1139.76 ; C24.2@2027.56,1966.54 v1(1924.21,1966.54) 2050,2092.32 2050,2148 2050,2196 2082,2228 ; v1(2077.76,2712.6) v1(2035.43,2712.6) 2082,2673 2082,2228 ; R9.1@2145,2228.4 2082,2228
  Top Layer w51.18: C10.1@688.98,1139.76 v1(797.24,1139.76) ; R10.1@688.98,1232.28 v1(797.24,1232.28) ; C12.1@688.98,1966.54 v1(792.32,1966.54)
  Top Layer w59.06: 1072.83,1742.13 C3.1@1171.26,1742.13 ; C1.1@1564.96,1742.13 1663.38,1742.13
  Bottom Layer w7.87: U1.189@935.04,2184.06 935.04,2272.04 v1(945,2282) ; HDR1.34@1090.55,2649.61 1090.55,2729.33 v1(1091,2724) ; v1(1215.54,2753.95) 1229.33,2740.16 1229.33,2708.66 1216.54,2695.87 HDR1.42@1216.54,2649.61 ; U1.92@1328.74,847.44 1328.74,754.92 v1(1338.58,745.08) ; U1.209@1328.74,2184.06 1328.74,2251.97 v1(1343.5,2266.73) ; v1(2009,733) 2035.43,706.57 HDR2.94@2035.43,649.61 ; HDR1.94@2035.43,2649.61 v1(2035.43,2712.6) ; v1(2047,733) 2066.93,713.07 HDR2.96@2066.93,649.61 ; HDR1.96@2066.93,2649.61 2066.93,2701.77 v1(2077.76,2712.6)
  Bottom Layer w11.81: U1.130@689.96,1112.2 769.69,1112.2 v1(797.24,1139.76) ; U1.157@689.96,1643.7 741.14,1643.7 756.3,1658.86 756.3,1702.16 769.68,1715.55 v1(793.31,1715.55) ; U1.172@689.96,1938.98 735.24,1938.98 762.8,1966.54 v1(792.32,1966.54) ; 865.25,918.4 886.01,897.64 924.21,897.64 935.04,886.81 U1.112@935.04,847.44 935.04,776.57 v1(946.85,764.76) ; 1324.8,899.17 1328.74,895.23 U1.92@1328.74,847.44 ; v1(1713.58,2044.29) 1713.58,2075.78 1761.81,2124.01 U1.231@1761.81,2184.06 ; v1(1752.95,923.22) 1761.81,914.37 U1.70@1761.81,847.44 ; v1(1924.21,1966.54) 1954.72,1966.54 1982.28,1938.98 U1.9@2026.57,1938.98 ; v1(1958.66,1131.89) 1978.35,1112.2 U1.51@2026.57,1112.2 ; v1(1969.49,1683.07) U1.22@2026.57,1683.07
  Bottom Layer w19.68: v1(1298.23,1096.46) 1298.23,925.74 1324.8,899.17
  Bottom Layer w39.37: v1(747,1460) 767,1440 v1@1057,1440 ; v1(792.32,1966.54) v1(854.33,1966.54) 921.26,1899.61 v1(1057.09,1899.61) ; v1(793.31,1715.55) v1(1057.09,1715.55) ; v1(797.24,1139.76) v1(1057.09,1139.76) ; v1(797.24,1232.28) v1(1057.09,1232.28) ; 865.25,918.4 865.25,969.58 902.56,1006.89 1051.18,1006.89 v1(1140.75,1096.46) ; v1(1368.11,1899.61) v1(1368.11,2052.17) ; v1(1550.2,1899.61) 1567.91,1899.61 v1@1712.6,2044.29 ; v1(1599.41,1096.46) 1752.95,942.91 v1(1752.95,923.22) ; v1(1670.28,1780.51) 1741.14,1780.51 1919.29,1958.66 v1(1924.21,1966.54) ; v1(1671.26,1190.94) 1730.31,1131.89 v1(1882.7,1131.75) v1(1958.66,1131.89) ; v1(1671.26,1683.07) v1(1969.49,1683.07)
  other v1: 1057.09,1440
VCCINT: C2.1 C4.1 C13.1 C14.1 C15.1 C16.1 C17.1 C18.1 C27.2 C28.2 C29.2 C30.2 C31.2 C32.2 HDR1.93 HDR1.95 HDR2.93 HDR2.95 R2.1 R6.1 R7.1 U1.72 U1.81 U1.90 U1.97 U1.103 U1.110 U1.191 U1.198 U1.204 U1.211 U1.220 U1.229 | length 7368.2
  Top Layer w19.68: v1(984.25,742.13) 1003.94,761.81 C18.1@1003.94,818.9 1062.99,818.9 1073.82,829.72 ; C27.2@1003.94,2212.6 1051.18,2212.6 1061.02,2202.76 ; 1061.02,1978.35 1061.02,2202.76 ; 1073.82,1013.78 1073.82,829.72 ; v1(1122.05,750.98) 1131.89,760.83 C17.1@1131.89,818.9 1084.65,818.9 1073.82,829.72 ; v1(1122.05,2273.62) C28.2@1122.05,2212.6 1070.87,2212.6 1061.02,2202.76 ; 1172.24,1978.35 1172.24,2202.76 1182.09,2212.6 C29.2@1210.63,2212.6 ; 1185.04,999.02 1185.04,829.72 1195.87,818.9 C16.1@1240.16,818.9 v1(1240.16,750.98) ; C29.2@1220.47,2212.6 C29.2@1210.63,2212.6 ; v1(1240.16,2273.62) 1210.63,2244.09 C29.2@1210.63,2212.6 ; v1(1359.25,2308.07) 1373.03,2308.07 1427.17,2253.94 C30.2@1427.17,2212.6 1472.44,2212.6 1482.28,2202.76 ; v1(1377.95,767.72) 1435.04,767.72 1446.85,779.53 C15.1@1446.85,818.9 1403.54,818.9 1392.72,829.72 1392.72,1013.78 ; 1482.28,1978.35 1482.28,2202.76 ; v1(1501.96,1019.69) 1501.97,828.74 1511.81,818.9 C14.1@1555.12,818.9 v1(1555.12,762.8) ; v1(1555.12,2261.81) 1535.43,2242.13 C31.2@1535.43,2212.6 1492.13,2212.6 1482.28,2202.76 ; 1592.52,1978.35 1592.52,2203.74 1601.38,2212.6 C32.2@1653.54,2212.6 1653.54,2242.13 1676.18,2264.76 v1(1745.08,2264.76) ; 1620.08,1013.78 1620.08,828.74 1629.92,818.9 C13.1@1673.23,818.9 ; v1(1950,2270) 1938.98,2250 1938.98,2152.56 1953.74,2137.8 R2.1@1988.19,2137.8
  Top Layer w35.43: v1(2032,2280.63) v1(2032,2320)
  Top Layer w39.37: R6.1@856.3,1789.37 974.41,1789.37 ; C13.1@1673.23,818.9 1698.82,818.9 v1(1735.24,782.48) 1735.24,619.09 v1(2051.18,303.15) v1(2090.55,303.15) ; 1762.8,1789.37 R7.1@1860.24,1789.37 ; 1762.81,1993.44 1795,1993.44 1830,2028.44 1830,2276.45 1911.81,2358.26 2005.74,2358.26 2032,2332 v1(2032,2320)
  Top Layer w59.06: v1(1171.26,1190.94) C2.1@1171.26,1269.69 ; v1(1564.96,1190.94) C4.1@1564.96,1269.69
  Bottom Layer w7.87: U1.103@1112.2,847.44 1112.2,760.83 v1(1122.05,750.98) ; U1.198@1112.2,2184.06 1112.2,2263.78 v1(1122.05,2273.62) ; U1.97@1230.32,847.44 1230.31,760.83 v1(1240.16,750.98) ; U1.204@1230.32,2184.06 1230.31,2263.78 v1(1240.16,2273.62) ; v1(1359.25,2308.07) 1377.95,2289.37 1377.95,2250 1368.11,2240.16 U1.211@1368.11,2184.06 ; U1.90@1368.11,847.44 1368.11,777.56 v1(1377.95,767.72) ; U1.81@1545.28,847.44 1545.28,772.64 v1(1555.12,762.8) ; U1.220@1545.28,2184.06 1545.28,2251.97 v1(1555.12,2261.81) ; U1.72@1722.44,847.44 1722.44,796.26 v1(1735.24,782.48) ; U1.229@1722.44,2184.06 1722.44,2242.13 v1(1745.08,2264.76) ; v1(2032,2280.63) 2066.93,2315.56 HDR1.95@2066.93,2381.89 ; HDR1.93@2035.43,2381.89 v1@2036,2320
  Bottom Layer w9.84: HDR2.93@2035.43,381.89 2035.43,318.9 v1(2051.18,303.15) ; HDR2.95@2066.93,381.89 2066.93,326.77 v1(2090.55,303.15)
  Bottom Layer w11.81: v1(968.5,1979.33) 968.5,2085.76 974.41,2091.67 U1.191@974.41,2184.06 ; U1.110@974.41,847.44 974.41,794.29 984.25,784.45 v1(984.25,742.13)
  Bottom Layer w27.56: v1(1950,2270) 2021.37,2270 v1(2032,2280.63)
  Bottom Layer w39.37: v1(1171.26,1190.94) 1205.71,1156.5 v1(1205.71,1019.69) ; v1(1501.96,1019.69) 1501.96,1127.95 v1(1564.96,1190.94)
VDRIVE: HDR1.20 U1.165 | length 2049
  Bottom Layer w7.87: U1.165@689.96,1801.18 619.09,1801.18 545.28,1875 545.28,1913.87 125.5,2333.65 125.5,2628.08 268.08,2770.67 427.17,2770.67 499.02,2842.52 734.25,2842.52 870.08,2706.69 HDR1.20@870.08,2649.61
VREF: HDR1.91 R2.2 R3.1 | length 351.3
  Top Layer w19.68: R3.1@1889.76,2212.6 1889.76,2275.59 1924.21,2310.04 v1(1987,2310) 1988.19,2308.81 R2.2@1988.19,2212.6
  Bottom Layer w7.87: v1@1987,2317 2003.94,2333.94 HDR1.91@2003.94,2381.89
  Bottom Layer w9.06: v1(1987,2310) v1@1987,2317
pads on no net: HDR1.56 HDR1.MH1 HDR1.MH2 HDR1.MH3 HDR1.MH4 HDR1.MH5 HDR1.MH6 HDR2.MH1 HDR2.MH2 HDR2.MH3 HDR2.MH4 HDR2.MH5 HDR2.MH6 U1.19 U1.20 U1.21 U1.24 U1.32 U1.37 U1.162 U1.239 U1.240 U1.FID1 U1.FID2 U2.1

## Polygon pours and split planes (outlines as drawn)
GND on Top Layer "Top Layer-GND" (solid, remove dead copper, pour order 1000): 2718.8,3191.24 2719.73,3188.98 2719.73,0 2718.8,-2.26 2716.54,-3.2 0,-3.2 -2.26,-2.26 -3.2,0 -3.2,3188.98 -2.26,3191.24 0,3192.17 2716.54,3192.17
GND on Bottom Layer "Bottom Layer-GND" (solid, remove dead copper, pour order 1001): 2718.8,3191.24 2719.73,3188.98 2719.73,0 2718.8,-2.26 2716.54,-3.2 0,-3.2 -2.26,-2.26 -3.2,0 -3.2,3188.98 -2.26,3191.24 0,3192.17 2716.54,3192.17

## Keep-outs
Top Layer:
  lines w31.5: 0,0 2716.54,0
Keep-Out Layer:
  lines w31.5: 0,0 555.12,0 559.06,-3.94 1039.37,-3.94 1043.31,0 2716.54,0 2716.54,3031.5 ccw(c1358.27,-2748.05) 0.02,3031.5 0,0

## Other copper
Top Layer:
  rectangle net VCCINT: 941.93,994.09 1006.89,1955.71
  rectangle net VCCINT: 1002.95,994.09 1780.51,1050.2
  rectangle net VCCINT: 941.93,1946.85 1779.53,2013.78
  rectangle net VCCINT: 1721.46,1018.7 1780.51,1963.58
  rectangle net VCC: 1027.56,1069.88 1104.33,1926.18
  rectangle net VCC: 1080.71,1069.88 1698.82,1139.76
  rectangle net VCC: 1070.87,1823.82 1698.82,1926.18
  rectangle net VCC: 1630.91,1116.14 1698.82,1878.94

## Silkscreen, mask and mechanical layers (free items; w line width, h text height)
Bottom Overlay:
  drawing of 850 lines, arcs and shapes, not listed
  text "REV 1.02" at 1874.02,3011.8 h51.18
  text "NBP2" at 2145.67,3011.8 h51.18
  text "1" at 550,2300 h39.37
  text "1" at 560,300 h39.37
PCB Boundary:
  the board outline again, w9.84
  text "PCB boundary coincides with centre-line of tracks" at 0,-472.44 h29.53
Gerber ID:
  text ".Layer_Name" at 0,-236.22 h29.53
Printout ID:
  text ".Printout_Name" at 0,-393.7 h29.53
Drill Drawing:
  text ".Legend" at 0,-314.96 h29.53